# Altium PCB 65W LED Board.PcbDoc (part 3 of 3)
Units mm, origin at the board's own origin, x right, y up, seen from the top; angles counter-clockwise.
Board outline 40 x 69 mm, 4 copper layers (Top Layer, Layer 1, Layer 2, Bottom Layer), stack 1.573 mm thick; 54 components, 26 nets, 122 pads, 144 vias.
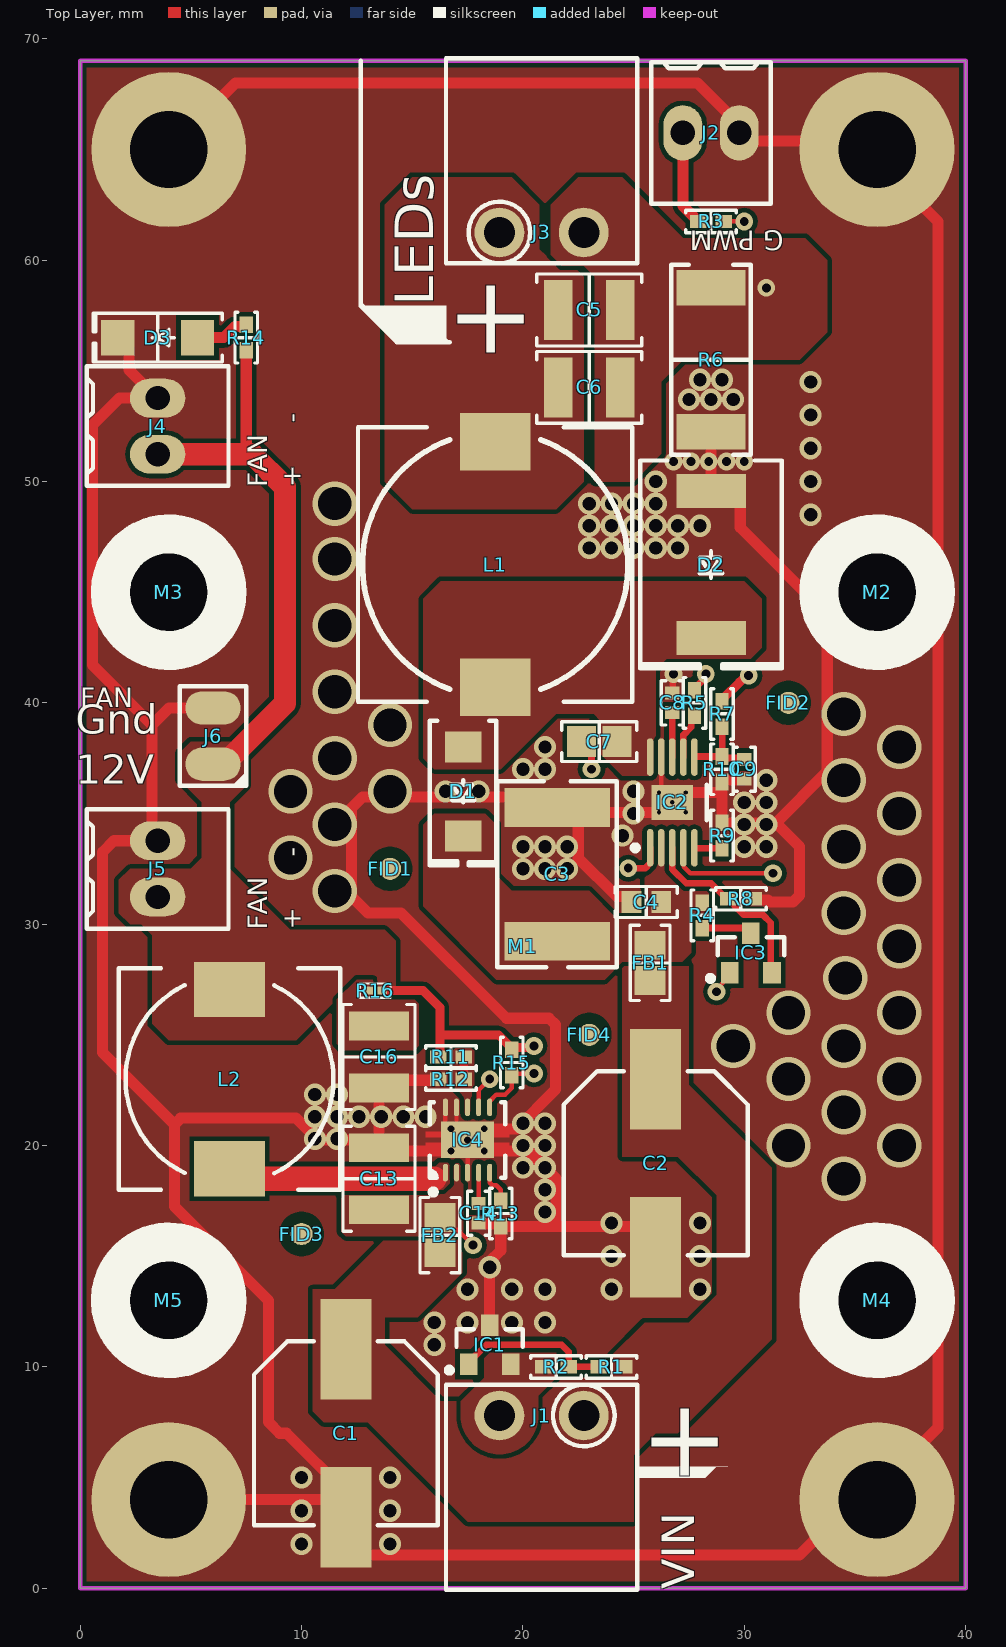
[diagram p0: Top Layer view]

## Keep-outs (continued)
Keep-Out Layer: (continued)
  lines w0.2: 0,0 0,69 40,69 40,0 28,0 0,0

## Other copper
Top Layer:
  pour cut-out: 23,26 ccw(c23,25) 22,25 ccw(c23,25) 23,24 ccw(c23,25) 24,25 ccw(c23,25) 23,26
  pour cut-out: 10,17 ccw(c10,16) 9,16 ccw(c10,16) 10,15 ccw(c10,16) 11,16 ccw(c10,16) 10,17
  pour cut-out: 32,41 ccw(c32,40) 31,40 ccw(c32,40) 32,39 ccw(c32,40) 33,40 ccw(c32,40) 32,41
  pour cut-out: 14,33.5 ccw(c14,32.5) 13,32.5 ccw(c14,32.5) 14,31.5 ccw(c14,32.5) 15,32.5 ccw(c14,32.5) 14,33.5

## Silkscreen, mask and mechanical layers (free items; w line width, h text height)
Top Overlay:
  region: 12.67,57.93 14.3,56.3 16.7,56.3 16.531,56.469 16.531,57.947 12.87,57.947 12.67,58.147
  region: 25.163,5.479 25.163,5.019 25.182,5 28.25,5 28.75,5.5 29.25,5.5
  lines w0.2: 12.67,69 12.67,57.93 14.3,56.3 16.7,56.3
  text "G PWM" at 31.794,61.633 h1.5 r180
  text "+" at 20.566,60 h6 r180
  text "LEDs" at 16.531,57.947 h3 r90
  text "FAN / +     -" at 10.25,49.75 h1.5 r90
  text "FAN" at 0,39.5 h1.5
  text "Gnd / 12V" at -0.213,35.917 h2.25
  text "FAN / +      -" at 10.25,29.75 h1.5 r90
  text "+" at 29.316,9.25 h6 r180
  text "VIN" at 28.249,-0.054 h2.5 r90
Bottom Overlay:
  text "GND" at 27.901,69.416 h1.5 r180
  text "PWM" at 23.867,68.917 h1.5 r180
  text "LED +" at 17.845,62.05 h2 r270
  text "LED -" at 21.655,62.05 h2 r270
  text "GND" at 11.636,51.912 h2.5
  text "12V" at 10.509,50.067 h2.5
  text "GND" at 7.136,34.012 h2.5
  text "12V" at 6.609,27.667 h2.5
  text "GND" at 16.973,0.391 h2.5 r270
  text "VIN+" at 20.773,0 h2.5 r270
Top Solder:
  region: 12.5,33 12.5,30 10,30 7.5,32.5 7.5,35.5 8,36 8,37 10.5,39.5 10.5,50.5 13,50.5 13,40 15,40 15,35.5
  region: 28,24.5 28,23 33.5,17.5 39.5,17.5 39.5,41 33.5,41 33.5,38 32.5,37 30.5,37 30.5,33 31.5,33 32.5,32 32.5,28 32,27.5 31,26.5 30,26.5
Bottom Solder:
  region: 30,17 30,13 27,10 15.5,10 14.5,11 14.5,13.5 15,14 17,14 18.5,15.5 18.5,17 17.5,18 10,18 8.5,19.5 8.5,23.5 9,24 16,24 18,22 28,22
  region: 39,17 39,41 31,41 31,40.5 29.5,39 26.5,39 23.5,36 22.5,36 21.5,37 21.5,39 16,39 13.5,41.5 13.5,45.5 14.5,46.5 32,46.5 34,48.5 34,55 33,56 14.5,56 9,50.5 9,37.5 8,36.5 8,31.5 9.5,30 22.5,30 23.5,31 23.5,32.5 24,33 32,33 32.5,32.5 32.5,29.5 28,25 28,19 30,17